# Altium PCB Copy of PCB Sarmast.PcbDoc
Units mil, origin at the board's own origin, x right, y up, seen from the top; angles counter-clockwise.
Board outline 6000 x 4000 mil, 2 copper layers (Top Layer, Bottom Layer); 18 components, 0 nets, 152 pads, 0 vias.
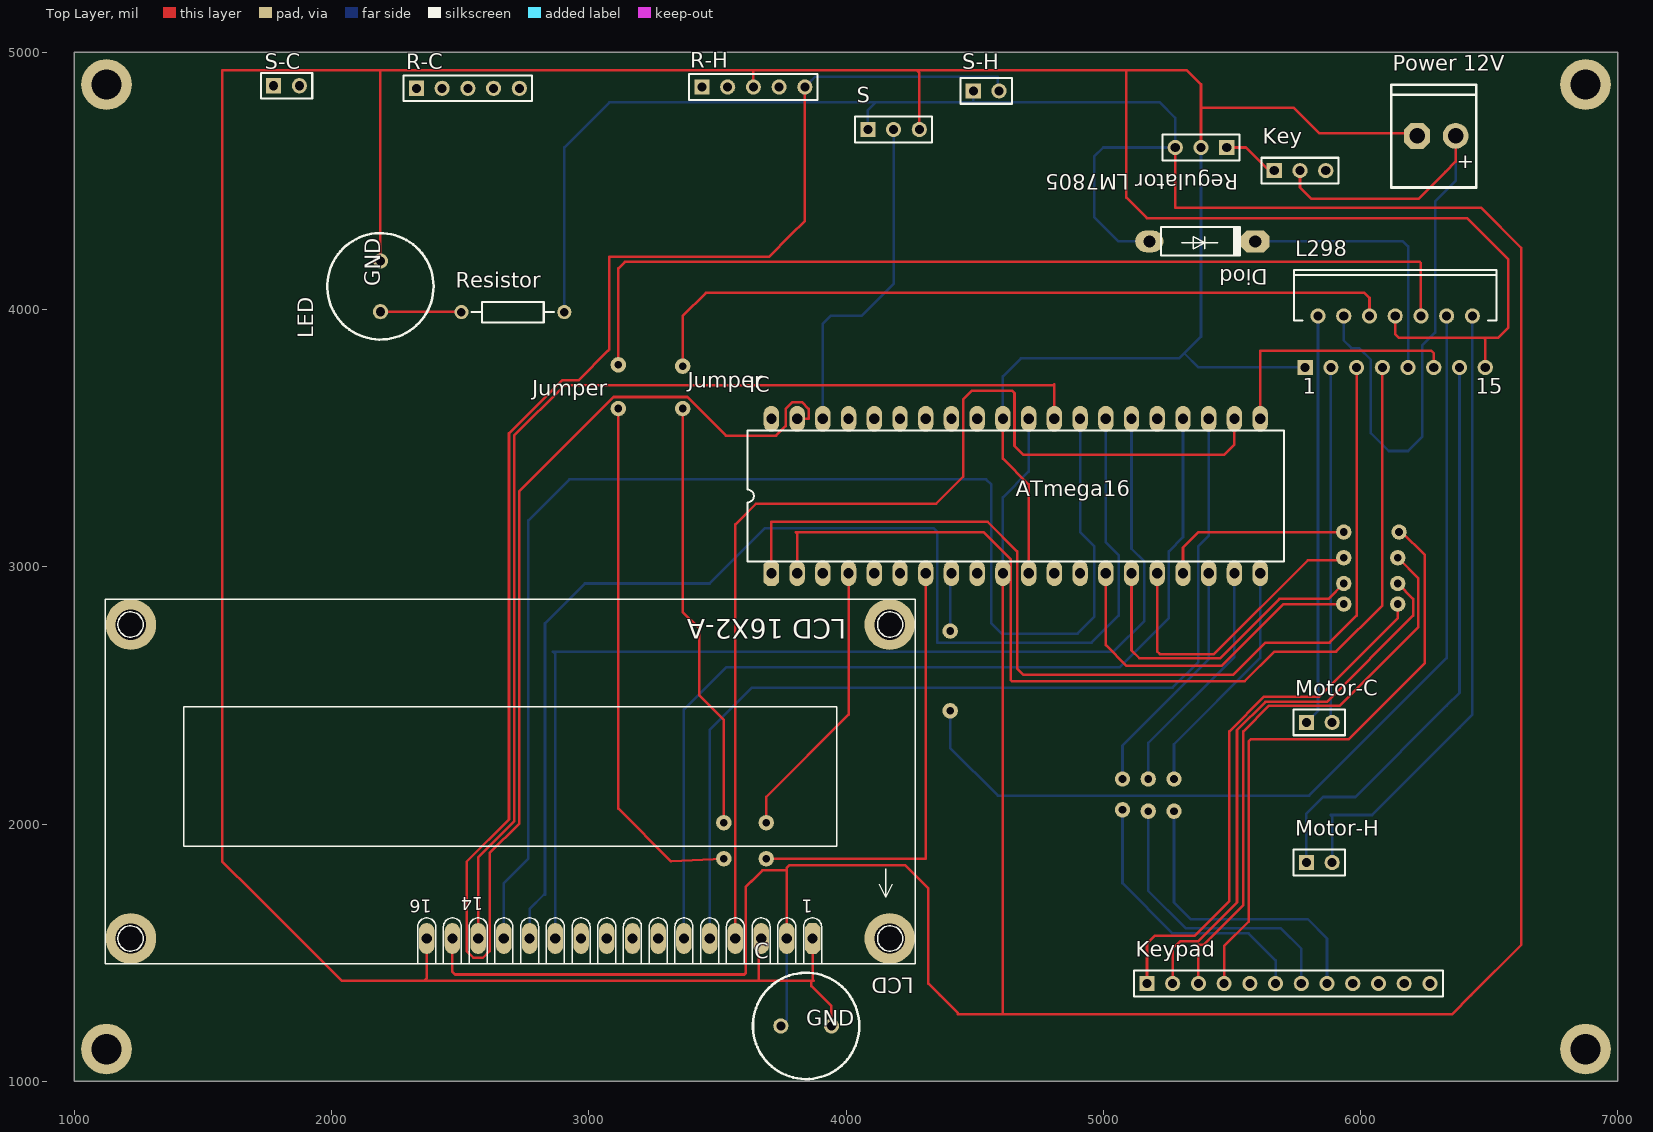
[diagram p0: Top Layer view]
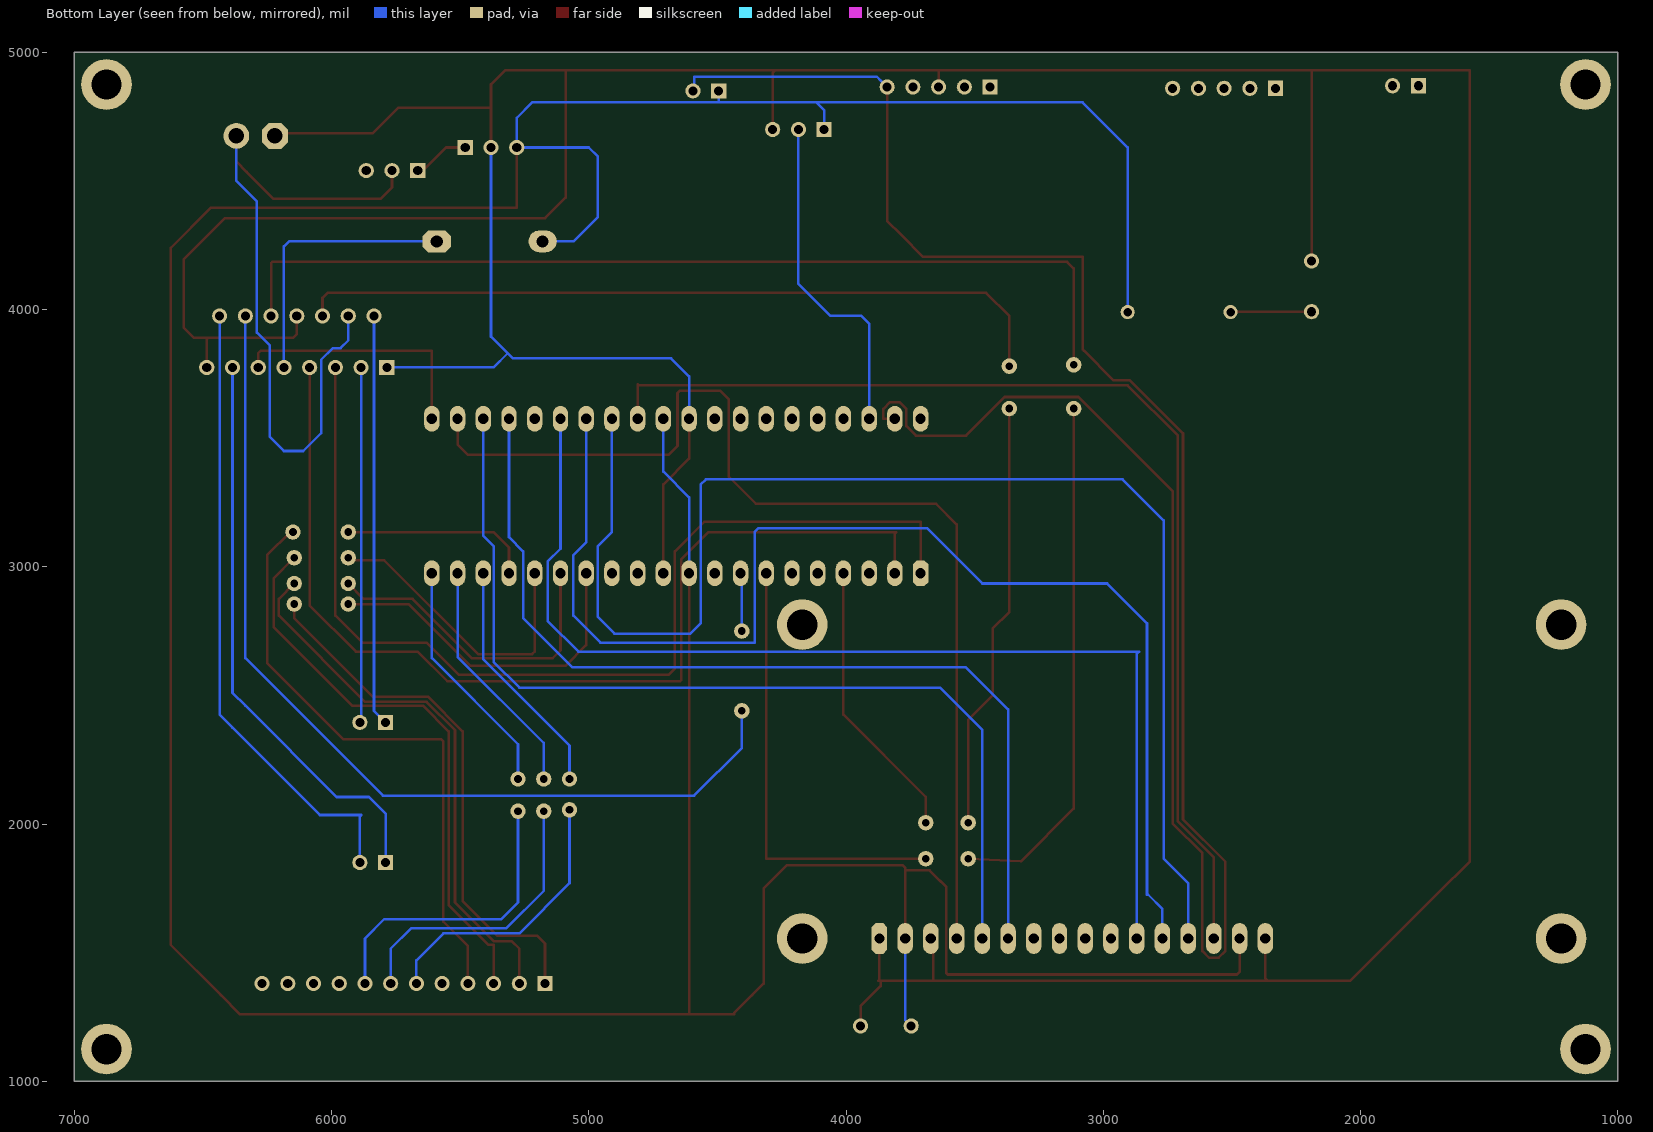
[diagram p1: Bottom Layer view, seen from below]

## Layer stack, top to bottom
Top Solder: solder mask 0.4, Solder Resist, Dk 3.5
Top Layer: signal copper 1.4
Dielectric1: dielectric 12.6, FR-4, Dk 4.8
Bottom Layer: signal copper 1.4
Bottom Solder: solder mask 0.4, Solder Resist, Dk 3.5

## Board outline
1000,1000 7000,1000 7000,5000 1000,5000

## Design rules (kind name [scope] priority, off if disabled: settings)
Clearance [All] p1: gap=10 ignorepadtopadclearanceinfootprint=FALSE
PolygonConnect [All] p1: connectstyle=Relief reliefconductorwidth=10 reliefentries=4 polygonreliefangle="90 Angle" airgapwidth=10
RoutingCorners Sarmast [All] p1: cornerstyle=45-Degree minsetback=100 maxsetback=100
RoutingCorners [All] p2: cornerstyle=45-Degree minsetback=100 maxsetback=100
RoutingVias [All] p1: holewidth=28 width=50 viastyle="Through Hole" minholewidth=28 minwidth=50 maxholewidth=28 maxwidth=50
SolderMaskExpansion [All] p1: expansion=4 istentingtop=FALSE
Width [All] p1: maxlimit=10 minlimit=10 preferedwidth=10
29 further rules are at their usual default settings.

## Components (designator, comment, footprint, x,y, rotation, side; value= is the part's Value field where it differs from the comment)
C "GND" RB5-10.5 3845,1215 r0 top
Diod "Comment" My_DO-41 5600,4275 r180 top
IC "ATmega16" My_40P6 4660,3275 r0 top
Key "Comment" HDR1X3 5665,4540 r0 top
Keypad "Comment" HDR1X12 5170,1380 r0 top
L298 "Comment" Multiwatt15V 6135,3875 r0 top
LCD "Comment" "My_LCD 16x2-A" 3870,1555 r180 top
LED "GND" RB5-10.5 2190,4090 r90 top
Motor-C "Comment" HDR1X2 5790,2395 r0 top
Motor-H "Comment" HDR1X2 5790,1850 r0 top
"Power 12V" "+" "My_ Power_Connector" 6070,4875 r0 top
R-C "Jumper" HDR1X5 2330,4860 r0 top
R-H "Comment" HDR1X5 3440,4865 r0 top
"Regulator LM7805" "Comment" HDR1X3 5480,4630 r180 top
Resistor "Jumper" AXIAL-0.4 2705,3990 r0 top
S "Comment" HDR1X3 4085,4700 r0 top
S-C "Comment" HDR1X2 1775,4870 r0 top
S-H "Comment" HDR1X2 4495,4850 r0 top

## Footprints (in the part's own frame and the unit in brackets; to place one, negate y for a bottom-side part, rotate by r counter-clockwise, add the part's x,y. Pads: shape width x height; smd on the part's side, far side on the other; paste and mask are expansions set on the pad)
AXIAL-0.4 [mm]
  round 1.4 hole 0.85: 1(-5.08,0) 2(5.08,0)
  silkscreen extent -4.06,-1.02 4.06,1.02
HDR1X2 [mm]
  rect 1.5x1.5 hole 0.9: 1(0,0)
  round 1.5 hole 0.9: 2(2.54,0)
  silkscreen extent -1.27,-1.27 3.81,1.27
HDR1X3 [mm]
  rect 1.5x1.5 hole 0.9: 1(0,0)
  round 1.5 hole 0.9: 2(2.54,0) 3(5.08,0)
  silkscreen extent -1.27,-1.27 6.35,1.27
HDR1X5 [mm]
  rect 1.5x1.5 hole 0.9: 1(0,0)
  round 1.5 hole 0.9: 2(2.54,0) 3(5.08,0) 4(7.62,0) 5(10.16,0)
  silkscreen extent -1.27,-1.27 11.43,1.27
HDR1X12 [mm]
  rect 1.5x1.5 hole 0.9: 1(0,0)
  round 1.5 hole 0.9: 2(2.54,0) 3(5.08,0) 4(7.62,0) 5(10.16,0) 6(12.7,0) 7(15.24,0) 8(17.78,0) 9(20.32,0) 10(22.86,0) 11(25.4,0) 12(27.94,0)
  silkscreen extent -1.27,-1.27 29.21,1.27
Multiwatt15V [mm] "TO, Thru-Hole, Vertical, Heatsink Mounted; 15 Bent Staggered Leads; Pitch 1.27 mm"
  rect 1.5x1.5 hole 0.9: 1(-8.89,-2.54)
  round 1.5 hole 0.9: 2(-7.62,2.54) 3(-6.35,-2.54) 4(-5.08,2.54) 5(-3.81,-2.54) 6(-2.54,2.54) 7(-1.27,-2.54) 8(0,2.54) 9(1.27,-2.54) 10(2.54,2.54) 11(3.81,-2.54) 12(5.08,2.54) 13(6.35,-2.54) 14(7.62,2.54) 15(8.89,-2.54)
  silkscreen extent -10,2.09 10,7.09
My_40P6 [mil]
  oct 60x100 hole 40: 1(-950,-300)
  oval 60x100 hole 40: 2(-850,-300) 3(-750,-300) 4(-650,-300) 5(-550,-300) 6(-450,-300) 7(-350,-300) 8(-250,-300) 9(-150,-300) 10(-50,-300) 11(50,-300) 12(150,-300) 13(250,-300) 14(350,-300) 15(450,-300) 16(550,-300) 17(650,-300) 18(750,-300) 19(850,-300) 20(950,-300) 21(950,300) 22(850,300) 23(750,300) 24(650,300) 25(550,300) 26(450,300) 27(350,300) 28(250,300) 29(150,300) 30(50,300) 31(-50,300) 32(-150,300) 33(-250,300) 34(-350,300) 35(-450,300) 36(-550,300) 37(-650,300) 38(-750,300) 39(-850,300) 40(-950,300)
  silkscreen extent -1043,-254 1043,254
"My_ Power_Connector" [mil]
  oct 100x100 hole 60: 1(150,-200)
  round 100 hole 60: 2(300,-200)
  silkscreen extent 50,-400 380,0
My_DO-41 [mil]
  oval 110x85 hole 47.24: A(420.71,10)
  oct 110x85 hole 47.24: K(8.9,10)
  silkscreen extent 64,-45 375,65
"My_LCD 16x2-A" [mil]
  round 196.85 hole 118.11: 0(-300,0) 1(-300,-1220) 2(2650,0) 3(2650,-1220)
  oct 60x120 hole 40: 1(0,0)
  oval 60x120 hole 40: 2(100,0) 3(200,0) 4(300,0) 5(400,0) 6(500,0) 7(600,0) 8(700,0) 9(800,0) 10(900,0) 11(1000,0) 12(1100,0) 13(1200,0) 14(1300,0) 15(1400,0) 16(1500,0)
  silkscreen extent -400,-1319 2750,98
RB5-10.5 [mm]
  round 1.5 hole 0.9: 1(-2.5,0) 2(2.5,0)
  silkscreen extent -5.25,-5.25 5.25,5.25

## Free pads (board coordinates)
  round 60 hole 30: 0(3365,3780) 1(3365,3615) 3(3690,2005) 4(3525,2005) 5(3115,3785) 6(3115,3615) 7(3525,1865) 8(3690,1865) 9(4405,2440) 10(4405,2750) 12(5935,2855) 13(6145,2855) 14(6145,2935) 15(5935,2935) 16(5935,3035) 17(6145,3035) 18(5935,3135) 19(6150,3135) 20(5075,2175) 21(5075,2055) 22(5175,2050) 23(5275,2050) 24(5175,2175) 25(5275,2175)
  round 196.85 hole 118.11: 11(1125,1125) 12(1125,4875) 13(6875,4875) 14(6875,1125)

## Nets (pads, with @x,y where several pads share a name; then routed paths per layer and width w, separated by ;. In a path a pad name is that pad's centre, name@x,y a point inside that pad or via, vN(x,y) a via of type N, cw(c..) or ccw(c..) an arc to the next point about the centre after c; other vN are vias at no path point)
pads on no net: "Power 12V.1" "Power 12V.2" "Regulator LM7805.1" "Regulator LM7805.2" "Regulator LM7805.3" C.1 C.2 Diod.A Diod.K IC.1 IC.2 IC.3 IC.4 IC.5 IC.6 IC.7 IC.8 IC.9 IC.10 IC.11 IC.12 IC.13 IC.14 IC.15 IC.16 IC.17 IC.18 IC.19 IC.20 IC.21 IC.22 IC.23 IC.24 IC.25 IC.26 IC.27 IC.28 IC.29 IC.30 IC.31 IC.32 IC.33 IC.34 IC.35 IC.36 IC.37 IC.38 IC.39 IC.40 Key.1 Key.2 Key.3 Keypad.1 Keypad.2 Keypad.3 Keypad.4 Keypad.5 Keypad.6 Keypad.7 Keypad.8 Keypad.9 Keypad.10 Keypad.11 Keypad.12 L298.1 L298.2 L298.3 L298.4 L298.5 L298.6 L298.7 L298.8 L298.9 L298.10 L298.11 L298.12 L298.13 L298.14 L298.15 LCD.0 LCD.1 LCD.2 LCD.3 LCD.4 LCD.5 LCD.6 LCD.7 LCD.8 LCD.9 LCD.10 LCD.11 LCD.12 LCD.13 LCD.14 LCD.15 LCD.16 LED.1 LED.2 Motor-C.1 Motor-C.2 Motor-H.1 Motor-H.2 R-C.1 R-C.2 R-C.3 R-C.4 R-C.5 R-H.1 R-H.2 R-H.3 R-H.4 R-H.5 Resistor.1 Resistor.2 S-C.1 S-C.2 S-H.1 S-H.2 S.1 S.2 S.3
copper on no net: | length 133401.2
  Top Layer w10: 2185,4930 2190,4925 2190,4188.43 ; 2190,3991.57 2493.43,3991.57 2505,3980 ; 2365,1395 2370,1400 2370,1555 ; 2470,1555 2470,1425 2480,1415 3605,1415 3610,1420 3610,1755 3635,1780 ; 2570,1555 2570,1870 2710,2010 2710,3510 2905,3705 4805,3705 4810,3710 4810,3575 ; 3115,3615 3115,2060 3320,1855 3525,1865 ; 3115,3785 3115,4160 3140,4185 6230,4185 6235,4180 6235,3975 ; 3365,3615 3365,2825 3430,2760 3430,2500 3525,2405 3525,2005 ; 3365,3780 3365,3975 3455,4065 6015,4065 6035,4045 6035,3975 ; 3570,1555 3570,3165 3650,3245 4350,3245 4455,3350 4455,3650 4490,3685 4645,3685 4655,3675 4655,3470 4690,3435 5470,3435 5510,3475 5510,3575 ; 3630,1775 3675,1820 3770,1820 ; 3640,4865 3640,4900 3640,4930 ; 3660,1395 3660,1545 3670,1555 ; 3690,1865 4310,1865 4310,2975 ; 3690,2005 3690,2105 4010,2425 4010,2975 ; 3710,2975 3710,3175 4550,3175 4665,3060 4665,2605 4690,2580 5505,2580 5630,2705 5880,2705 5985,2810 5985,3775 ; 3770,1555 3770,1830 3780,1840 4230,1840 4320,1750 4320,1380 4365,1335 4435,1265 4435,1260 5023.9,1260 5435.71,1260 6355,1260 6430,1335 6625,1530 6625,4240 6470,4395 5280,4395 5280,4630 ; 3810,2975 3810,3130 3805,3135 4535,3135 4640,3030 4640,2560 4645,2555 5550,2555 5665,2670 5905,2670 6085,2850 6085,3775 ; 3810,3575 3855,3575 3855,3613.64 3828.64,3640 3791.36,3640 3765,3613.64 3765,3546.36 3728.64,3510 3533.64,3510 3383.64,3660 3096.36,3660 2730,3293.64 2730,2001.72 2615,1886.72 2615,1506.36 2588.64,1480 2551.36,1480 2525,1506.36 2525,1853.28 2690,2018.28 2690,3518.28 2896.72,3725 2960,3725 3075,3840 3080,3845 3080,4205 3700,4205 3785,4290 3840,4345 3840,4865 ; 3865,1390 3865,1370 3943.43,1291.57 3943.43,1215 ; 3870,1555 3870,1395 3875,1390 2040,1390 1700,1730 1575,1855 1575,4930 5325,4930 5380,4875 5380,4630 ; 4275,4930 4285,4920 4285,4700 ; 4610,1265 4610,1335 4610,2820 4610,2965 ; 4610,3575 4610,3420 4710,3320 4710,2975 ; 5010,2975 5010,2695 5090,2615 5420,2615 5460,2615 5700,2855 5935,2855 ; 5090,4930 5090,4435 5170,4355 6415,4355 6575,4195 6575,3930 6535,3890 6150,3890 6135,3905 6135,3975 ; 5110,2975 5110,2675 5140,2645 5455,2645 5685,2875 5875,2875 5935,2935 5935,2960 ; 5170,1380 5170,1535 5200,1565 5355,1565 5490,1700 5490,2360 5625,2495 5840,2495 6145,2800 6145,2855 ; 5210,2975 5210,2670 5220,2660 5430,2660 5795,3025 5930,3025 ; 5270,1380 5270,1515 5300,1545 5370,1545 5520,1695 5520,2365 5630,2475 5870,2475 6205,2810 6205,2875 6145,2935 ; 5310,2975 5310,3075 5370,3135 5525,3135 5935,3135 ; 5370,1380 5370,1530 5390,1530 5545,1685 5545,2360 5645,2460 5920,2460 6225,2765 6225,2955 6145,3035 ; 5380,4785 5740,4785 5840,4685 6230,4685 ; 5470,1380 5470,1525 5565,1620 5565,2320 5575,2330 5955,2330 6250,2625 6250,3045 6160,3135 6150,3135 ; 5480,4630 5555,4630 5650,4535 ; 5610,3575 5610,3840 6275,3840 6285,3830 6285,3775 ; 5765,4540 5765,4475 5810,4430 6225,4430 6330,4535 6370,4575 6370,4675 ; 6145,2960 6157.5,2947.5 ; 6480,3890 6485,3885 6485,3775
  Bottom Layer w10: 2670,1555 2670,1770 2765,1865 2765,3180 2925,3340 4545,3340 4565,3320 4565,2780 4605,2740 4900,2740 4965,2805 4965,3080 4910,3135 4910,3575 ; 2770,1555 2770,1670 2825,1725 2830,1725 2830,2780 2985,2935 3470,2935 3685,3150 4340,3150 4355,3135 4355,2705 4955,2705 5060,2810 5060,3045 5010,3095 5010,3575 ; 2870,1555 2870,2660 2860,2670 5040,2670 5160,2790 5160,3020 5110,3070 5110,3575 ; 2905,3990 2905,4630 3080,4805 4115,4805 ; 3370,1555 3370,2445 3535,2610 5065,2610 5255,2800 5255,3060 5310,3115 5310,3575 ; 3470,1555 3470,2365 3635,2530 5270,2530 5370,2630 5370,3080 5410,3120 5410,3575 ; 3746.57,1215 3770,1238.43 3770,1555 ; 3835,4860 3863.99,4888.99 3880,4905 4590,4905 4590,4855 4595,4850 ; 3910,3575 3910,3945 3940,3975 4060,3975 4185,4100 4185,4700 ; 4085,4700 4085,4775 4115,4805 ; 4405,2440 4405,2295 4590,2110 5800,2110 6335,2645 6335,3975 ; 4405,2750 4405,2970 4410,2975 ; 4495,4805 4495,4850 4495,4825 ; 4610,2975 4610,3270 4710,3370 4710,3575 ; 4610,3575 4610,3740 4680,3810 5295,3810 5380,3895 5380,4630 ; 5075,2055 5075,1770 5270,1575 5480,1575 5565,1575 5670,1470 5670,1380 ; 5075,2175 5075,2305 5410,2640 5410,2975 ; 5175,2050 5175,1740 5320,1595 5515,1595 5690,1595 5770,1515 5770,1380 ; 5175,2175 5175,2315 5510,2650 5510,2975 ; 5179.29,4265 5060,4265 4965,4360 4965,4595 5000,4630 5280,4630 5280,4745 5220,4805 4115,4805 ; 5275,2050 5275,1695 5340,1630 5795,1630 5870,1555 5870,1380 ; 5275,2175 5275,2310 5610,2645 5610,2975 ; 5315,3830 5370,3775 5785,3775 ; 5591.1,4265 6165,4265 6185,4245 6185,3775 ; 5790,1850 5790,2040 5855,2105 5980,2105 6335,2460 6385,2510 6385,3775 ; 5790,2395 5835,2440 5835,3975 ; 5885,3775 5885,2400 5890,2395 ; 5890,1850 5890,2030 5885,2035 6045,2035 6385,2375 6435,2425 6435,3975 ; 5935,3975 5935,3880 5965,3850 5995,3850 6040,3805 6040,3520 6110,3450 6185,3450 6240,3505 6240,3860 6290,3910 6290,4420 6370,4500 6370,4675

## Text inside footprints (layer, text, board x,y; h text height)
L298: Top Overlay "1" at 5775.94,3671.65 h59.06; Top Overlay "15" at 6447.6,3671.65 h59.06
LCD: Top Overlay "14" at 2590,1715 h50 r180; Top Overlay "1" at 3870,1705 h50 r180; Top Overlay "16" at 2390,1705 h50 r180; Top Overlay "LCD 16X2-A" at 4000,2795 h75 r180